# EAGLE board clock (EAGLE 7.7.0)
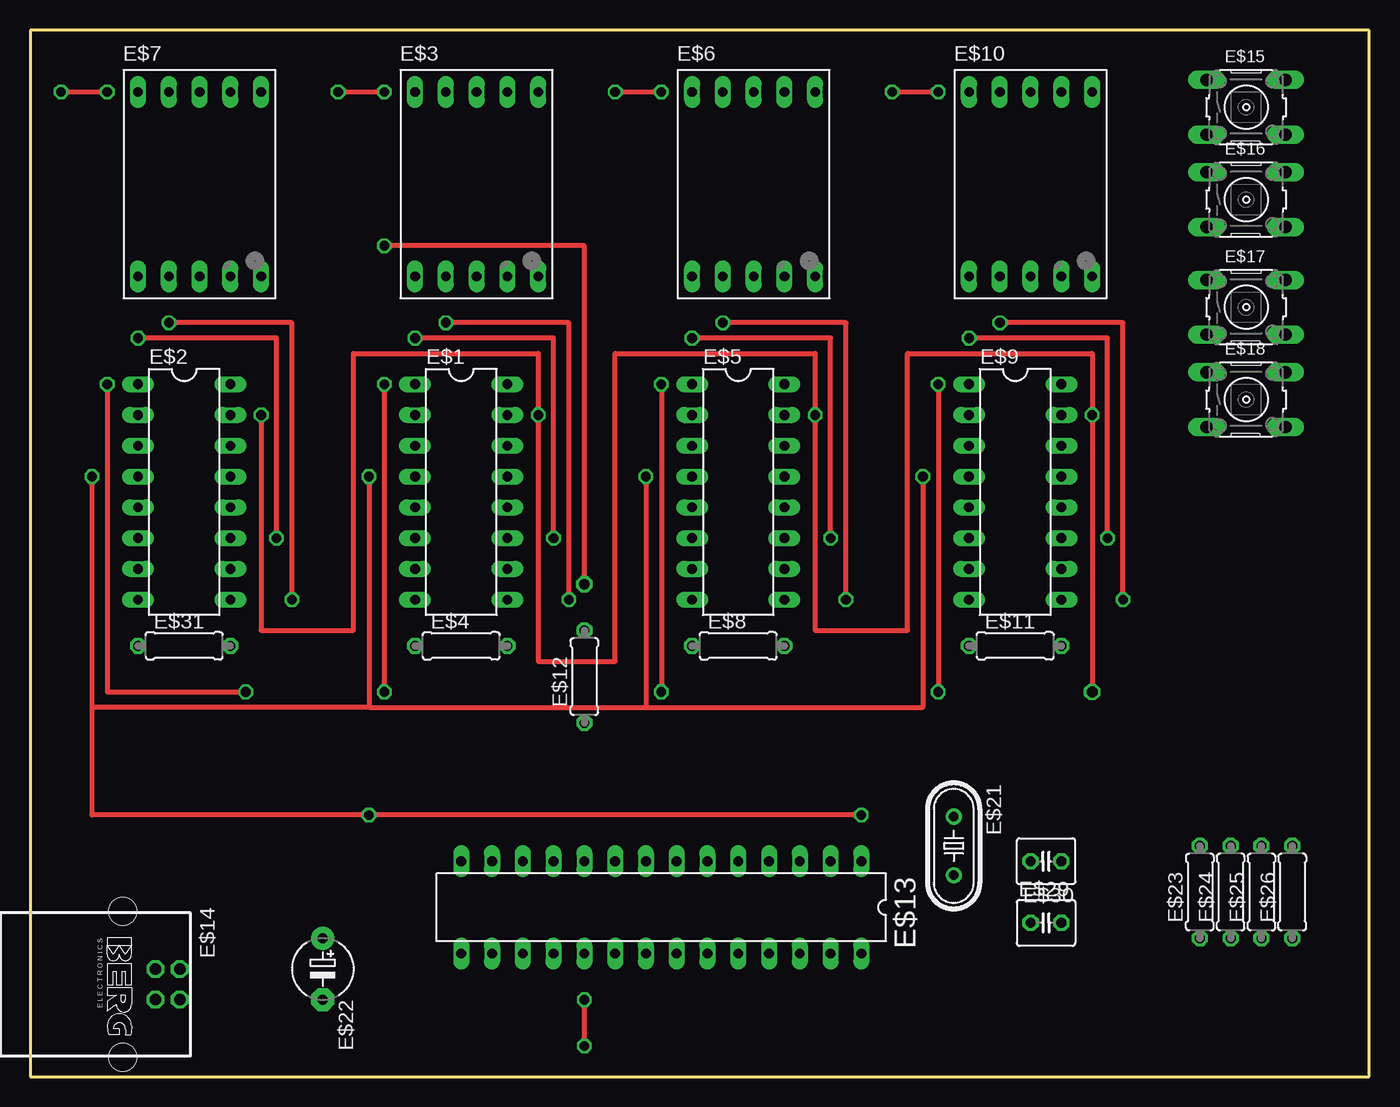
[diagram p0: board, top side]
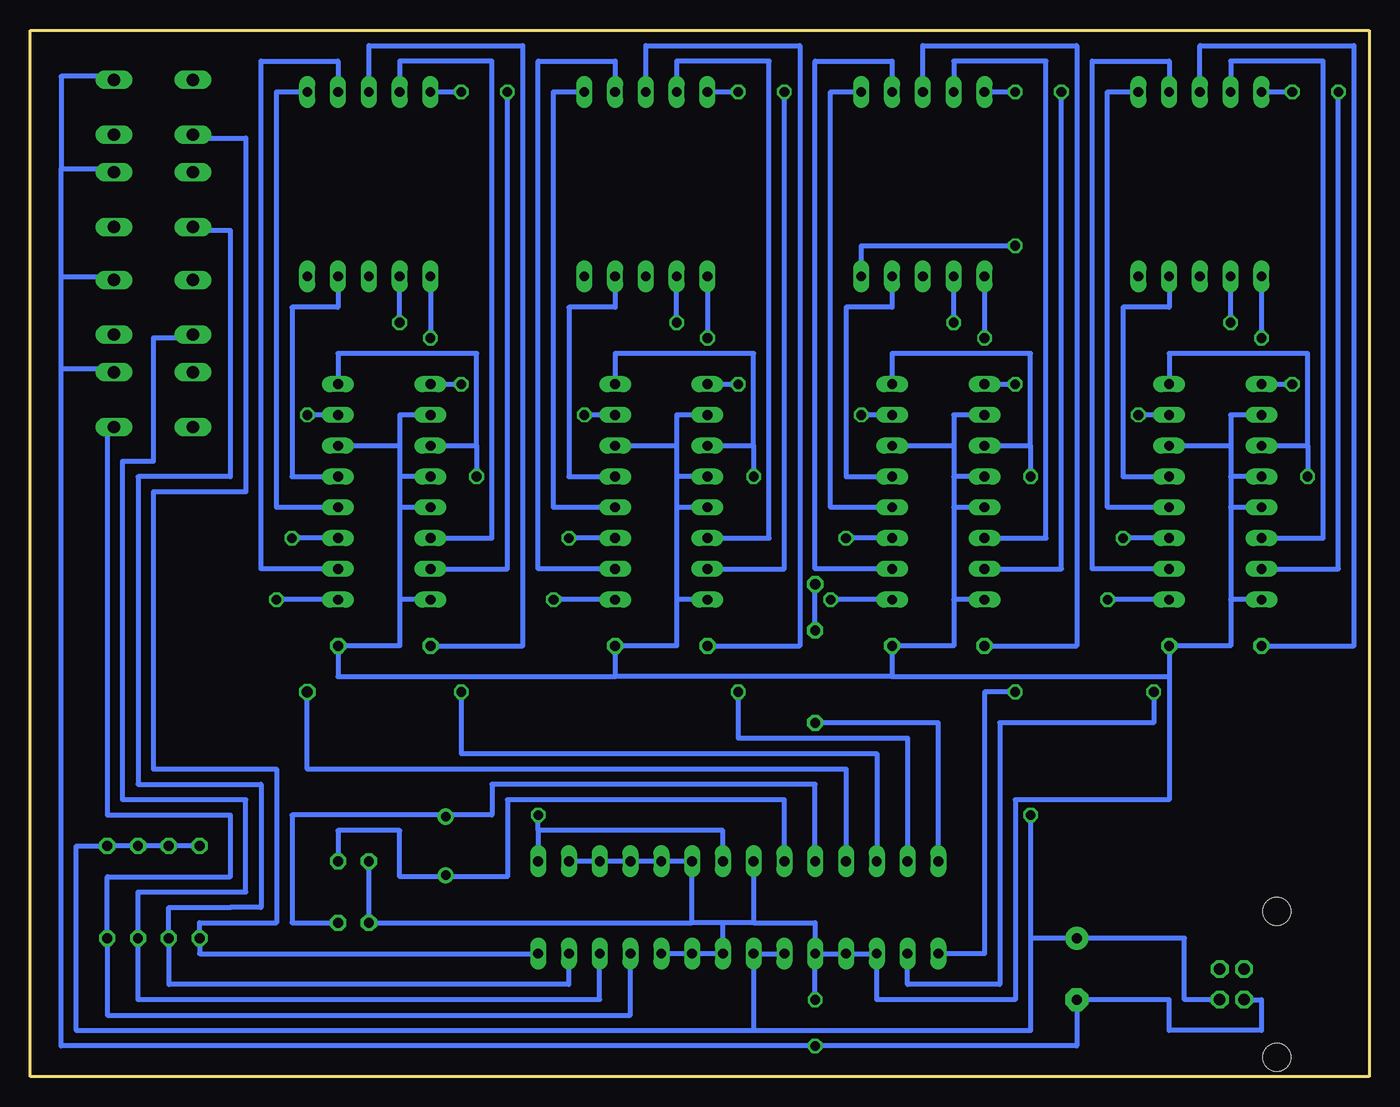
[diagram p1: board, bottom side, seen from below]

Size 110.49 x 86.36 mm. Coordinates in mm from the lower left corner, seen from the top.
Outline: 0,86.36 0,0 110.49,0 110.49,86.36 0,86.36
Copper layers (1*16): Top 0.035mm / dielectric 1.5mm / Bottom 0.035mm
Design rules "default": minimum track width 10mil, minimum drill 24mil, track to track 8mil, track to pad 8mil, pad to pad 8mil, via to via 8mil, smd to smd 8mil, copper to edge 40mil, drill to drill 8mil, minimum pad ring 10mil, minimum via ring 8mil, stop-mask expansion 4mil, vias tented up to drill 0mil, thermal gap 10mil

## Footprints (pad centres in the part's own frame; a part is rotated, then mirrored left to right if it is on the bottom)
DIL16 = drill 0.813 long: 1 -8.89,-3.81; 2 -6.35,-3.81; 3 -3.81,-3.81; 4 -1.27,-3.81; 5 1.27,-3.81; 6 3.81,-3.81; 7 6.35,-3.81; 8 8.89,-3.81; 9 8.89,3.81; 10 6.35,3.81; 11 3.81,3.81; 12 1.27,3.81; 13 -1.27,3.81; 14 -3.81,3.81; 15 -6.35,3.81; 16 -8.89,3.81
SA56-11 = drill 0.8 long: 1 -5.08,-7.62; 2 -2.54,-7.62; 3 0,-7.62; 4 2.54,-7.62; 5 5.08,-7.62; 6 5.08,7.62; 7 2.54,7.62; 8 0,7.62; 9 -2.54,7.62; 10 -5.08,7.62
0207/7 = drill 0.813 octagon: 1 -3.81,0; 2 3.81,0
DIL28-3 = drill 0.813 long: 1 -16.51,-3.81; 2 -13.97,-3.81; 3 -11.43,-3.81; 4 -8.89,-3.81; 5 -6.35,-3.81; 6 -3.81,-3.81; 7 -1.27,-3.81; 8 1.27,-3.81; 9 3.81,-3.81; 10 6.35,-3.81; 11 8.89,-3.81; 12 11.43,-3.81; 13 13.97,-3.81; 14 16.51,-3.81; 15 16.51,3.81; 16 13.97,3.81; 17 11.43,3.81; 18 8.89,3.81; 19 6.35,3.81; 20 3.81,3.81; 21 1.27,3.81; 22 -1.27,3.81; 23 -3.81,3.81; 24 -6.35,3.81; 25 -8.89,3.81; 26 -11.43,3.81; 27 -13.97,3.81; 28 -16.51,3.81
PN61729 = drill 0.95 octagon: 1 1.25,4.71; 2 -1.25,4.71; 3 -1.25,2.71; 4 1.25,2.71 | hole 2.3: -6.02,0; 6.02,0
B3F-10XX = drill 1.016 long: 1 -3.251,2.261; 2 3.251,2.261; 3 -3.251,-2.261; 4 3.251,-2.261
HC49/S = drill 0.813: 1 -2.413,0; 2 2.413,0
E5-5 = drill 0.813 pad 1.905: + -2.54,0 | drill 0.813 pad 1.905 octagon: - 2.54,0
C025-040X050 = drill 0.813 octagon: 1 -1.27,0; 2 1.27,0

## Placement (x,y rotation side)
E$1  [DIL16]  35.56,48.26 270 top
E$2  [DIL16]  12.7,48.26 270 top
E$3  [SA56-11]  36.83,73.66 0 top
E$4  [0207/7]  35.56,35.56 0 top
E$5  [DIL16]  58.42,48.26 270 top
E$6  [SA56-11]  59.69,73.66 0 top
E$7  [SA56-11]  13.97,73.66 0 top
E$8  [0207/7]  58.42,35.56 0 top
E$9  [DIL16]  81.28,48.26 270 top
E$10  [SA56-11]  82.55,73.66 0 top
E$11  [0207/7]  81.28,35.56 0 top
E$12  [0207/7]  45.72,33.02 90 top
E$13  [DIL28-3]  52.07,13.97 180 top
E$14  [PN61729]  7.62,7.62 270 top
E$15  [B3F-10XX]  100.33,80.01 0 top
E$16  [B3F-10XX]  100.33,72.39 0 top
E$17  [B3F-10XX]  100.33,63.5 0 top
E$18  [B3F-10XX]  100.33,55.88 0 top
E$21  [HC49/S]  76.2,19.05 270 top
E$22  [E5-5]  24.13,8.89 270 top
E$23  [0207/7]  96.52,15.24 90 top
E$24  [0207/7]  99.06,15.24 90 top
E$25  [0207/7]  101.6,15.24 90 top
E$26  [0207/7]  104.14,15.24 90 top
E$29  [C025-040X050]  83.82,12.7 0 top
E$30  [C025-040X050]  83.82,17.78 180 top
E$31  [0207/7]  12.7,35.56 0 top

## Library data of the parts
E$1 E$2 E$5 E$9 = 40xx
E$3 E$6 E$7 E$10 = display-kingbright
E$4 E$8 E$11 E$12 E$22-E$26 E$29-E$31 = rcl
E$13 = atmel
E$14 = con-berg
E$15-E$18 = buttons
E$21 = crystal

## Nets
S$1: E$13.14
S$2: E$13.9 E$30.1
S$3: E$2.13 E$7.4
S$4: E$2.12 E$7.6
S$5: E$2.11 E$7.1
S$6: E$2.10 E$7.7
S$7: E$2.9 E$7.2
S$8: E$13.26 E$25.1
S$9: E$13.10 E$29.2
S$10: E$2.6 E$7.9
S$11: E$2.7 E$7.10
S$13: E$5.15 E$9.15 E$13.11
S$14: E$2.1 E$13.16
S$15: E$7.8 E$31.1
S$16: E$1.15 E$2.15
S$17: E$1.2 E$1.4 E$1.5 E$1.8 E$1.14 E$2.2 E$2.4 E$2.5 E$2.8 E$2.14 E$4.2 E$5.2 E$5.4 E$5.5 E$5.8 E$5.14 E$8.2 E$9.2 E$9.4 E$9.5 E$9.8 E$9.14 E$11.2 E$13.2 E$13.6 E$13.8 E$13.17 E$13.18 E$13.19 E$13.22 E$13.24 E$22.- E$29.1 E$30.2 E$31.2
S$18: E$1.13 E$3.4
S$19: E$1.12 E$3.6
S$21: E$1.11 E$3.1
S$22: E$1.10 E$3.7
S$23: E$1.9 E$3.2
S$24: E$1.6 E$3.9
S$25: E$1.7 E$3.10
S$26: E$1.1 E$13.15
S$27: E$1.3 E$1.16 E$2.3 E$2.16 E$5.3 E$5.16 E$9.3 E$9.16 E$13.1 E$13.7 E$13.20 E$13.21 E$22.+ E$23.2 E$24.2 E$25.2 E$26.2
S$28: E$3.8 E$4.1
S$31: E$5.13 E$6.4
S$32: E$5.12 E$6.6
S$33: E$5.11 E$6.1
S$34: E$5.10 E$6.7
S$35: E$5.9 E$6.2
S$36: E$5.6 E$6.9
S$37: E$5.7 E$6.10
S$39: E$5.1 E$13.13
S$40: E$3.5 E$12.2
S$41: E$6.8 E$8.1
S$44: E$9.13 E$10.4
S$45: E$9.12 E$10.6
S$46: E$9.11 E$10.1
S$47: E$9.10 E$10.7
S$48: E$9.9 E$10.2
S$49: E$9.6 E$10.9
S$50: E$9.7 E$10.10
S$51: E$9.1 E$13.12
S$52: E$13.27 E$24.1
S$53: E$10.8 E$11.1
S$54: E$13.28 E$23.1
S$55: E$13.25 E$26.1

## Tracks (layer width: path | path; a pad name or v marks a point on that pad's centre or on a via)
S$1
  Bottom 0.406: 45.72,29.21 35.56,29.21 E$13.14
S$2
  Bottom 0.406: E$13.9 48.26,22.86 71.12,22.86 71.12,16.51 80.01,16.51 80.01,20.32 85.09,20.32 E$30.1
S$3
  Bottom 0.406: E$2.13 20.32,49.53 20.32,63.5 16.51,63.5 E$7.4
S$4
  Bottom 0.406: E$2.12 21.59,46.99 21.59,81.28 E$7.6
S$5  (via drill 0.8)
  Top 0.406: v20.32,44.45 20.32,60.96 v8.89,60.96
  Bottom 0.406: E$2.11 v20.32,44.45 | E$7.1 v8.89,60.96
S$6
  Bottom 0.406: E$2.10 22.86,41.91 22.86,83.82 16.51,83.82 E$7.7
S$7  (via drill 0.8)
  Top 0.406: v21.59,39.37 21.59,62.23 v11.43,62.23
  Bottom 0.406: E$2.9 v21.59,39.37 | v11.43,62.23 E$7.2
S$8
  Bottom 0.406: E$13.26 63.5,6.35 101.6,6.35 E$25.1 101.6,15.24 92.71,15.24 92.71,22.86 102.87,22.86 102.87,50.8 100.33,50.8 100.33,60.96 97.79,60.96
S$9
  Bottom 0.406: E$13.10 45.72,24.13 72.39,24.13 72.39,21.59 88.9,21.59 88.9,12.7 E$29.2
S$10
  Bottom 0.406: E$2.6 3.81,44.45 3.81,83.82 11.43,83.82 E$7.9
S$11  (via drill 0.8)
  Top 0.406: v2.54,81.28 v6.35,81.28
  Bottom 0.406: E$2.7 2.54,41.91 v2.54,81.28 | E$7.10 v6.35,81.28
S$13  (via drill 0.8, 0.9)
  Top 0.406: 41.91,36.83 41.91,34.29 48.26,34.29 48.26,59.69 64.77,59.69 v64.77,54.61 64.77,36.83 72.39,36.83 72.39,59.69 87.63,59.69 v87.63,54.61 v87.63,31.75
  Bottom 0.406: E$5.15 v64.77,54.61 | E$9.15 v87.63,54.61 | E$13.11 43.18,25.4 87.63,25.4 v87.63,31.75
S$14  (via drill 0.8)
  Top 0.406: v6.35,57.15 6.35,31.75 v17.78,31.75
  Bottom 0.406: E$2.1 v6.35,57.15 | v17.78,31.75 17.78,29.21 30.48,29.21 30.48,7.62 38.1,7.62 E$13.16
S$15
  Bottom 0.406: E$7.8 13.97,85.09 1.27,85.09 1.27,35.56 E$31.1
S$16  (via drill 0.8)
  Top 0.406: v19.05,54.61 19.05,36.83 26.67,36.83 26.67,59.69 41.91,59.69 v41.91,54.61 41.91,36.83
  Bottom 0.406: E$2.15 v19.05,54.61 | E$1.15 v41.91,54.61
S$17  (via drill 0.8)
  Top 0.406: v45.72,2.54 v45.72,6.35
  Bottom 0.406: 10.16,6.35 8.89,6.35 8.89,3.81 16.51,3.81 16.51,6.35 E$22.- 24.13,2.54 v45.72,2.54 107.95,2.54 107.95,58.42 | E$13.24 E$13.22 53.34,12.7 | E$1.2 34.29,54.61 34.29,52.07 | E$1.14 34.29,52.07 | 34.29,52.07 34.29,49.53 | E$1.4 34.29,49.53 | 34.29,49.53 34.29,46.99 | E$1.5 34.29,46.99 | 34.29,46.99 34.29,39.37 | E$1.8 34.29,39.37 | 34.29,39.37 34.29,35.56 E$4.2 39.37,33.02 | E$2.2 11.43,54.61 11.43,52.07 | E$2.14 11.43,52.07 | 11.43,52.07 11.43,49.53 | E$2.4 11.43,49.53 | 11.43,49.53 11.43,46.99 | E$2.5 11.43,46.99 | 39.37,33.02 16.51,33.02 | 16.51,33.02 E$31.2 11.43,35.56 11.43,39.37 | 11.43,46.99 11.43,39.37 | E$2.8 11.43,39.37 | 16.51,33.02 16.51,22.86 29.21,22.86 29.21,6.35 40.64,6.35 E$13.17 | E$13.2 E$13.6 55.88,12.7 | 55.88,12.7 E$29.1 E$30.2 | 50.8,12.7 53.34,12.7 | 53.34,12.7 55.88,12.7 | 104.14,82.55 107.95,82.55 107.95,74.93 | 107.95,74.93 104.14,74.93 | E$13.8 50.8,12.7 | 50.8,12.7 45.72,12.7 E$13.19 | 107.95,66.04 104.14,66.04 | 107.95,66.04 107.95,74.93 | 104.14,58.42 107.95,58.42 | 107.95,58.42 107.95,66.04 | E$13.19 E$13.17 | v45.72,6.35 E$13.19 | E$13.18 E$13.17 | E$9.2 80.01,54.61 80.01,52.07 | E$9.14 80.01,52.07 | E$5.2 57.15,54.61 57.15,52.07 | E$5.14 57.15,52.07 | 80.01,52.07 80.01,49.53 | E$9.4 80.01,49.53 | 80.01,49.53 80.01,46.99 | E$9.5 80.01,46.99 | 57.15,52.07 57.15,49.53 | E$5.4 57.15,49.53 | 57.15,49.53 57.15,46.99 | E$5.5 57.15,46.99 | 80.01,46.99 80.01,39.37 | E$9.8 80.01,39.37 | 80.01,39.37 80.01,35.56 E$11.2 85.09,33.02 62.23,33.02 | 57.15,46.99 57.15,39.37 | E$5.8 57.15,39.37 | 57.15,39.37 57.15,35.56 E$8.2 62.23,33.02 | 39.37,33.02 62.23,33.02
S$18
  Bottom 0.406: E$1.13 43.18,49.53 43.18,63.5 39.37,63.5 E$3.4
S$19
  Bottom 0.406: E$1.12 44.45,46.99 44.45,81.28 E$3.6
S$21  (via drill 0.8)
  Top 0.406: v43.18,44.45 43.18,60.96 v31.75,60.96
  Bottom 0.406: E$1.11 v43.18,44.45 | E$3.1 v31.75,60.96
S$22
  Bottom 0.406: E$1.10 45.72,41.91 45.72,83.82 39.37,83.82 E$3.7
S$23  (via drill 0.8)
  Top 0.406: v44.45,39.37 44.45,62.23 v34.29,62.23
  Bottom 0.406: E$1.9 v44.45,39.37 | v34.29,62.23 E$3.2
S$24
  Bottom 0.406: E$1.6 26.67,44.45 26.67,83.82 34.29,83.82 E$3.9
S$25  (via drill 0.8)
  Top 0.406: v25.4,81.28 v29.21,81.28
  Bottom 0.406: E$1.7 25.4,41.91 v25.4,81.28 | E$3.10 v29.21,81.28
S$26  (via drill 0.8)
  Top 0.406: v29.21,57.15 v29.21,31.75
  Bottom 0.406: E$1.1 v29.21,57.15 | v29.21,31.75 31.75,31.75 31.75,10.16 E$13.15
S$27  (via drill 0.8)
  Top 0.406: v68.58,21.59 v27.94,21.59 5.08,21.59 5.08,30.48 | v73.66,49.53 73.66,30.48 50.8,30.48 | v50.8,49.53 50.8,30.48 | v27.94,49.53 27.94,30.48 | 27.94,30.48 50.8,30.48 | v5.08,49.53 5.08,30.48 | 27.94,30.48 5.08,30.48
  Bottom 0.406: 12.7,6.35 15.24,6.35 15.24,11.43 E$22.+ 27.94,11.43 | 50.8,3.81 106.68,3.81 106.68,19.05 E$26.2 E$25.2 E$24.2 E$23.2 | 50.8,3.81 27.94,3.81 27.94,11.43 | 50.8,3.81 E$13.21 E$13.20 | v27.94,21.59 27.94,11.43 | E$13.7 53.34,20.32 68.58,20.32 | 68.58,20.32 E$13.1 | 68.58,20.32 v68.58,21.59 | E$9.16 85.09,59.69 73.66,59.69 73.66,52.07 | E$5.16 62.23,59.69 50.8,59.69 50.8,52.07 | E$1.16 39.37,59.69 27.94,59.69 27.94,52.07 | E$9.3 73.66,52.07 | E$2.16 16.51,59.69 5.08,59.69 5.08,52.07 | E$5.3 50.8,52.07 | 73.66,52.07 v73.66,49.53 | E$1.3 27.94,52.07 | 50.8,52.07 v50.8,49.53 | E$2.3 5.08,52.07 | 27.94,52.07 v27.94,49.53 | 5.08,52.07 v5.08,49.53
S$28
  Bottom 0.406: E$3.8 36.83,85.09 24.13,85.09 24.13,35.56 E$4.1
S$31
  Bottom 0.406: E$5.13 66.04,49.53 66.04,63.5 62.23,63.5 E$6.4
S$32
  Bottom 0.406: E$5.12 67.31,46.99 67.31,81.28 E$6.6
S$33  (via drill 0.8)
  Top 0.406: v66.04,44.45 66.04,60.96 v54.61,60.96
  Bottom 0.406: E$5.11 v66.04,44.45 | E$6.1 v54.61,60.96
S$34
  Bottom 0.406: E$5.10 68.58,41.91 68.58,83.82 62.23,83.82 E$6.7
S$35  (via drill 0.8)
  Top 0.406: v67.31,39.37 67.31,62.23 v57.15,62.23
  Bottom 0.406: E$5.9 v67.31,39.37 | v57.15,62.23 E$6.2
S$36
  Bottom 0.406: E$5.6 49.53,44.45 49.53,83.82 57.15,83.82 E$6.9
S$37  (via drill 0.8)
  Top 0.406: v48.26,81.28 v52.07,81.28
  Bottom 0.406: E$5.7 48.26,41.91 v48.26,81.28 | E$6.10 v52.07,81.28
S$39  (via drill 0.8)
  Top 0.406: v52.07,57.15 v52.07,31.75
  Bottom 0.406: E$5.1 v52.07,57.15 | v52.07,31.75 52.07,27.94 38.1,27.94 E$13.13
S$40  (via drill 0.8, 0.9)
  Top 0.406: v29.21,68.58 45.72,68.58 v45.72,40.64
  Bottom 0.406: E$3.5 41.91,68.58 v29.21,68.58 | E$12.2 v45.72,40.64
S$41
  Bottom 0.406: E$6.8 59.69,85.09 46.99,85.09 46.99,35.56 E$8.1
S$44
  Bottom 0.406: E$9.13 88.9,49.53 88.9,63.5 85.09,63.5 E$10.4
S$45
  Bottom 0.406: E$9.12 90.17,46.99 90.17,81.28 E$10.6
S$46  (via drill 0.8)
  Top 0.406: v88.9,44.45 88.9,60.96 v77.47,60.96
  Bottom 0.406: E$9.11 v88.9,44.45 | E$10.1 v77.47,60.96
S$47
  Bottom 0.406: E$9.10 91.44,41.91 91.44,83.82 85.09,83.82 E$10.7
S$48  (via drill 0.8)
  Top 0.406: v90.17,39.37 90.17,62.23 v80.01,62.23
  Bottom 0.406: E$9.9 v90.17,39.37 | v80.01,62.23 E$10.2
S$49
  Bottom 0.406: E$9.6 72.39,44.45 72.39,83.82 80.01,83.82 E$10.9
S$50  (via drill 0.8)
  Top 0.406: v71.12,81.28 v74.93,81.28
  Bottom 0.406: E$9.7 71.12,41.91 v71.12,81.28 | E$10.10 v74.93,81.28
S$51  (via drill 0.8)
  Top 0.406: v74.93,57.15 v74.93,31.75
  Bottom 0.406: E$9.1 v74.93,57.15 | v74.93,31.75 74.93,26.67 40.64,26.67 E$13.12
S$52
  Bottom 0.406: 96.52,69.85 93.98,69.85 93.98,49.53 101.6,49.53 101.6,24.13 91.44,24.13 91.44,13.97 93.98,13.97 95.25,13.97 99.06,13.97 E$24.1 99.06,7.62 66.04,7.62 E$13.27
S$53
  Bottom 0.406: E$10.8 82.55,85.09 69.85,85.09 69.85,35.56 E$11.1
S$54
  Bottom 0.406: 97.79,77.47 92.71,77.47 92.71,48.26 100.33,48.26 100.33,25.4 90.17,25.4 90.17,12.7 96.52,12.7 E$23.1 96.52,10.16 E$13.28
S$55
  Bottom 0.406: 104.14,53.34 104.14,21.59 93.98,21.59 93.98,16.51 104.14,16.51 E$26.1 104.14,5.08 60.96,5.08 E$13.25